# EAGLE board Circuit (EAGLE 6.5.0)
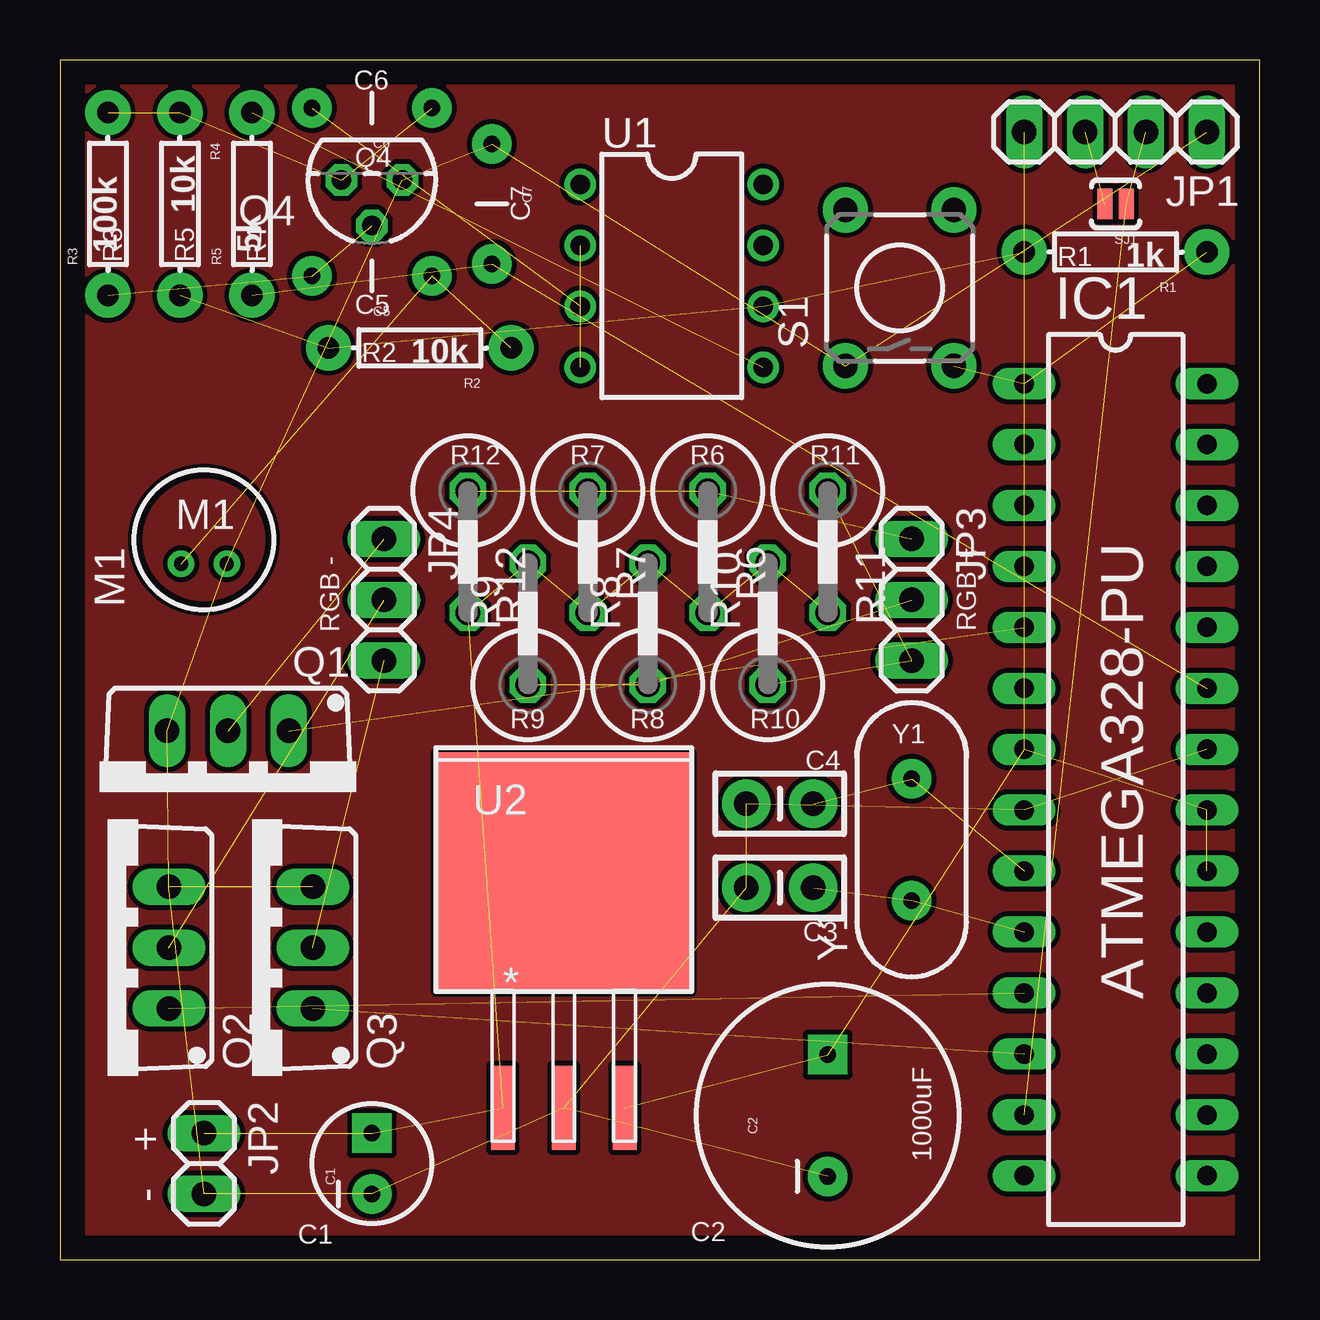
[diagram p0: board, top side]
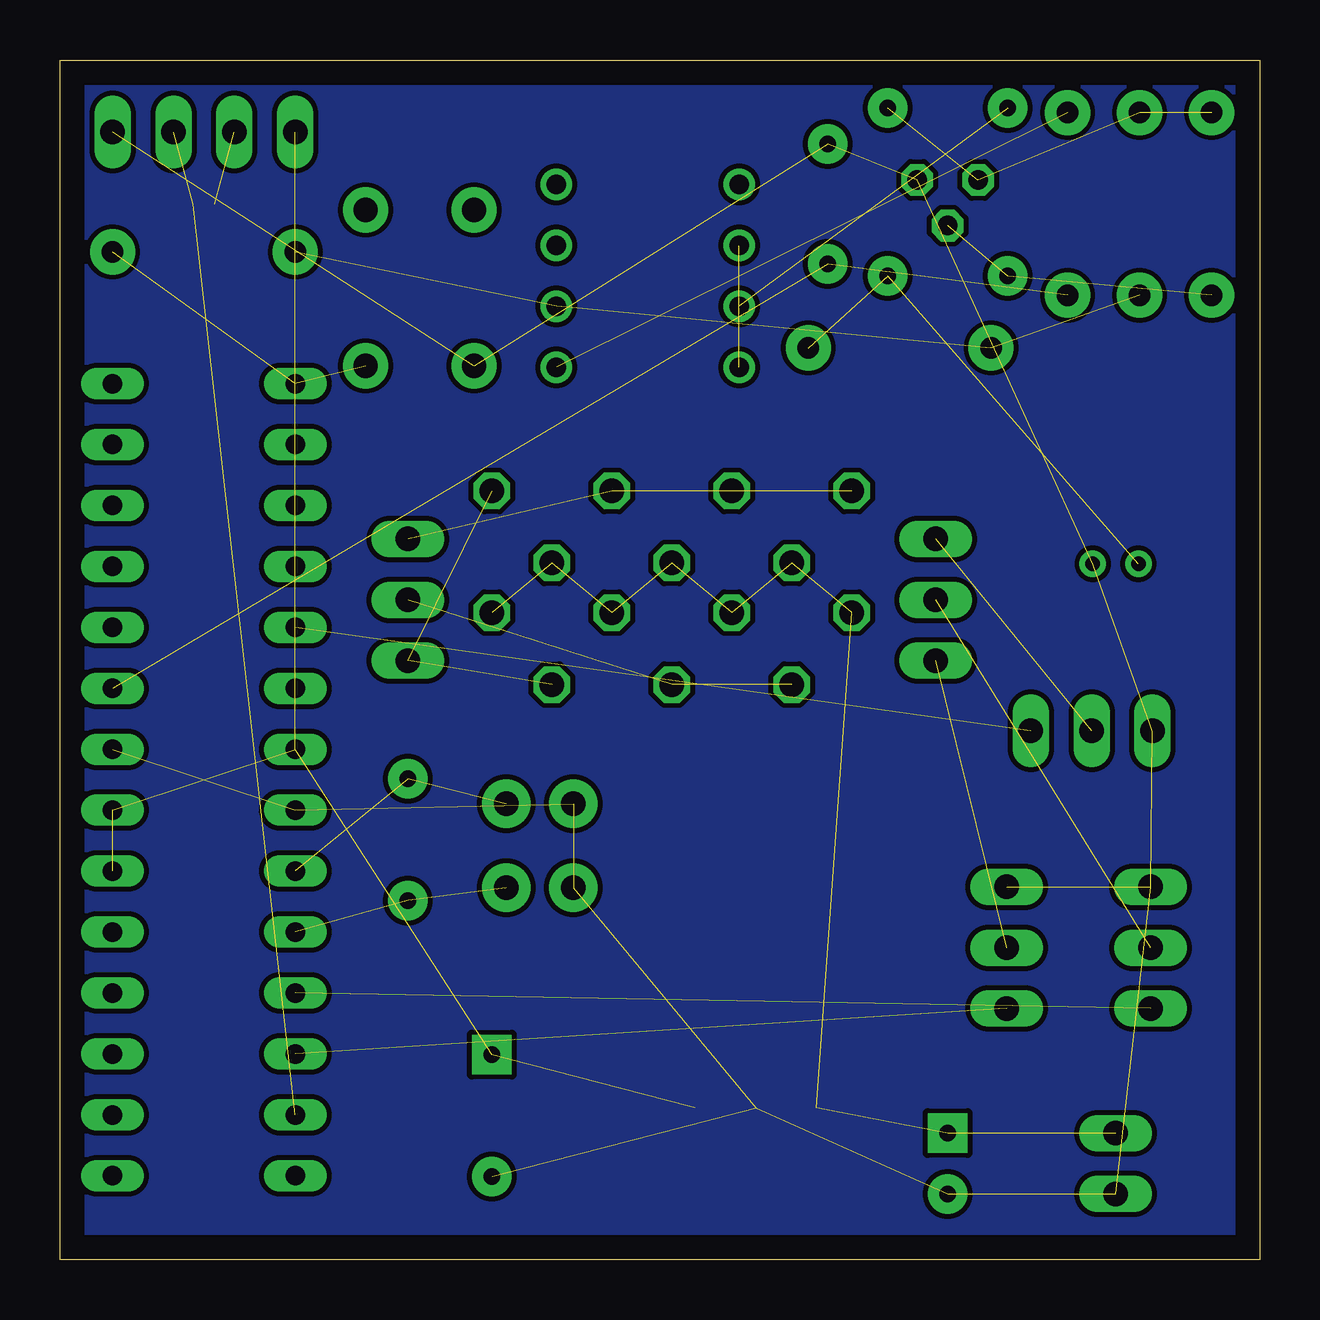
[diagram p1: board, bottom side, seen from below]

Size 50 x 50 mm. Coordinates in mm from the lower left corner, seen from the top.
Outline: 0,0 50,0 50,50 0,50 0,0
Copper layers (1*16): Top 0.035mm / dielectric 1.5mm / Bottom 0.035mm
Design rules "default": minimum track width 10mil, minimum drill 24mil, track to track 8mil, track to pad 8mil, pad to pad 8mil, via to via 8mil, smd to smd 8mil, copper to edge 40mil, drill to drill 8mil, minimum pad ring 10mil, minimum via ring 8mil, stop-mask expansion 4mil, vias tented up to drill 0mil, thermal gap 10mil

## Footprints (pad centres in the part's own frame; a part is rotated, then mirrored left to right if it is on the bottom)
CPOL-RADIAL-10UF-25V = drill 0.7 pad 1.651 square: 1 1.27,0 | drill 0.7 pad 1.651: 2 -1.27,0
CPOL-RADIAL-1000UF-25V = drill 0.7 pad 1.651 square: 1 2.54,0 | drill 0.7 pad 1.651: 2 -2.54,0
CAP-PTH-SMALL-KIT = drill 1.016 pad 2.032: 1 -1.397,0; 2 1.397,0
CAP-PTH-5MM = drill 0.7 pad 1.651: 1 -2.5,0; 2 2.5,0
DIL28-3 = drill 0.813 long: 1 -16.51,-3.81; 2 -13.97,-3.81; 3 -11.43,-3.81; 4 -8.89,-3.81; 5 -6.35,-3.81; 6 -3.81,-3.81; 7 -1.27,-3.81; 8 1.27,-3.81; 9 3.81,-3.81; 10 6.35,-3.81; 11 8.89,-3.81; 12 11.43,-3.81; 13 13.97,-3.81; 14 16.51,-3.81; 15 16.51,3.81; 16 13.97,3.81; 17 11.43,3.81; 18 8.89,3.81; 19 6.35,3.81; 20 3.81,3.81; 21 1.27,3.81; 22 -1.27,3.81; 23 -3.81,3.81; 24 -6.35,3.81; 25 -8.89,3.81; 26 -11.43,3.81; 27 -13.97,3.81; 28 -16.51,3.81
1X04 = drill 1.016 long: 1 -3.81,0; 2 -1.27,0; 3 1.27,0; 4 3.81,0
1X02 = drill 1.016 long: 1 -1.27,0; 2 1.27,0
1X03 = drill 1.016 long: 1 -2.54,0; 2 0,0; 3 2.54,0
WM-62PC/62PK = drill 0.6 pad 1: 1 -1,0.95; 2 -1,-0.95
TO220BV = drill 1.016 long: D 0,-2.54; G -2.54,-2.54; S 2.54,-2.54
TO92 = drill 0.813 octagon: 1 1.27,0; 2 0,1.905; 3 -1.27,0
AXIAL-0.3EZ = drill 0.9 pad 1.88: P$1 -3.81,0; P$2 3.81,0
P0613V = drill 1.016 octagon: 1 -2.54,0; 2 2.54,0
TACTILE-PTH = drill 1.016 pad 1.88: 1 -3.251,2.261; 2 3.251,2.261; 3 -3.251,-2.261; 4 3.251,-2.261
SJ_2S-NO = smd 0.635 x 1.27: 1 -0.45,0; 2 0.45,0
DIL08 = drill 0.813 pad 1.27: 1 -3.81,-3.81; 2 -1.27,-3.81; 3 1.27,-3.81; 4 3.81,-3.81; 5 3.81,3.81; 6 1.27,3.81; 7 -1.27,3.81; 8 -3.81,3.81
KTT3_6P22X6P6 = smd 10.668 x 9.957: 4 0,0.152 | smd 0.965 x 3.505: GND 0,-9.677; IN -2.54,-9.677; OUT 2.54,-9.677
HC49US = drill 0.7 pad 1.651: 1 -2.54,0; 2 2.54,0

## Placement (x,y rotation side)
C1  22uF  [CPOL-RADIAL-10UF-25V]  13,4 90 top
C2  1000uF  [CPOL-RADIAL-1000UF-25V]  32,6 90 top
C3  22pf  [CAP-PTH-SMALL-KIT]  30,19 0 top
C4  22pf  [CAP-PTH-SMALL-KIT]  30,15.5 0 top
C5  0.1u  [CAP-PTH-5MM]  13,41 180 top
C6  0.1u  [CAP-PTH-5MM]  13,48 180 top
C7  0.1u  [CAP-PTH-5MM]  18,44 270 top
IC1  ATMEGA328-PU  [DIL28-3]  44,20 270 top
JP1  FS1000A  [1X04]  44,47 180 top
JP2  SUPPLY  [1X02]  6,4 270 top
JP3  RGB +  [1X03]  35.5,27.5 270 top
JP4  RGB -  [1X03]  13.5,27.5 270 top
M1  MIC  [WM-62PC/62PK]  6,30 90 top
Q1  IRF520  [TO220BV]  7,19.5 180 top
Q2  IRF520  [TO220BV]  2,13 90 top
Q3  IRF520  [TO220BV]  8,13 90 top
Q4  2N3904  [TO92]  13,45 180 top
R1  1k  [AXIAL-0.3EZ]  44,42 180 top
R2  10k  [AXIAL-0.3EZ]  15,38 180 top
R3  100k  [AXIAL-0.3EZ]  2,44 90 top
R4  10k  [AXIAL-0.3EZ]  5,44 270 top
R5  5k  [AXIAL-0.3EZ]  8,44 90 top
R6  [P0613V]  27,29.5 270 top
R7  [P0613V]  22,29.5 270 top
R8  [P0613V]  24.5,26.5 90 top
R9  [P0613V]  19.5,26.5 90 top
R10  [P0613V]  29.5,26.5 90 top
R11  [P0613V]  32,29.5 270 top
R12  [P0613V]  17,29.5 270 top
S1  SWITCH-MOMENTARY-2PTH  [TACTILE-PTH]  35,40.5 90 top
SJ1  SOLDERJUMPERNO  [SJ_2S-NO]  44,44 180 top
U1  LM386N-4  [DIL08]  25.5,41 270 top
U2  UCC283-5_KTT_3  [KTT3_6P22X6P6]  21,16 0 top
Y1  16MHz  [HC49US]  35.5,17.5 90 top

## Library data of the parts
C1-C7 = SparkFun-Capacitors
IC1 = Arduino-AVR
JP1-JP4 = pinhead
M1 = microphon
Q1-Q3 = transistor-power
Q4 = transistor-npn
R1-R5 = SparkFun-Resistors
R6-R12 = resistor
S1 = SparkFun-Electromechanical
SJ1 = SparkFun-Passives
U1 = linear
U2 = UCC283-5; DATASHEETURL: http://www.ti.com/lit/gpn/UCC283-5; DESCRIPTION: Single Output LDO, 3.0A, Fixed(5.0V), Reverse Current Protection, Thermal Shutdown; FAMILY_NAME: SINGLE CHANNEL LDO; GENERIC_PART_NUMBER: UCC283-5; INDUSTRY_STD_PKG_TYPE: DDPAK/TO-263; MANUFACTURER: Texas Instruments; MANUFACTURER_PART_NUMBER: ucc283-5_ktt_3; PACKAGE_DESIGNATOR: KTT; PIN_COUNT: 3; VENDOR: Texas Instruments
Y1 = SparkFun-FreqCtrl

## Nets
+5V: C2.1 IC1.7 IC1.20 IC1.21 JP1.4 R1.P$2 R2.P$2 R4.P$2 U1.6 U2.OUT
+12V: C1.1 JP2.1 R6.2 R7.2 R8.2 R9.2 R10.2 R11.2 R12.2 U2.IN
BLUE: IC1.12 Q3.G
GND: C1.2 C2.2 C3.1 C4.1 C7.1 IC1.8 IC1.22 JP1.1 JP2.2 M1.2 Q1.S Q2.S Q3.S Q4.3 S1.1 U2.GND
GREEN: IC1.11 Q2.G
MIC: C7.2 IC1.23 R5.P$1
N$1: JP1.3 SJ1.2
N$2: C3.2 IC1.9 Y1.2
N$3: C4.2 IC1.10 Y1.1
N$4: IC1.1 R1.P$1 S1.3
N$5: JP4.1 Q1.D
N$6: JP4.2 Q2.D
N$7: JP4.3 Q3.D
N$8: C5.2 Q4.2 R3.P$1
N$9: C5.1 M1.1 R2.P$1
N$11: C6.1 Q4.1 R3.P$2 R4.P$1
N$12: R5.P$2 U1.5
N$15: U1.2 U1.4
N$16: JP3.1 R6.1 R7.1 R12.1
N$17: JP3.2 R8.1 R9.1
N$18: JP3.3 R10.1 R11.1
N$19: C6.2 U1.3
RED: IC1.5 Q1.G
RX: IC1.13 JP1.2 SJ1.1

## Tracks (layer width: path | path; a pad name or v marks a point on that pad's centre or on a via)
+5V  (9 unrouted)
+12V  (9 unrouted)
BLUE  (1 unrouted)
GND  (15 unrouted)
GREEN  (1 unrouted)
MIC  (2 unrouted)
N$1  (1 unrouted)
N$2  (2 unrouted)
N$3  (2 unrouted)
N$4  (2 unrouted)
N$5  (1 unrouted)
N$6  (1 unrouted)
N$7  (1 unrouted)
N$8  (2 unrouted)
N$9  (2 unrouted)
N$10
  pour Top: 0,50 50,50 50,0 0,0
N$11  (3 unrouted)
N$12  (1 unrouted)
N$14
  pour Bottom: 0,50 50,50 50,0 0,0
N$15  (1 unrouted)
N$16  (3 unrouted)
N$17  (2 unrouted)
N$18  (2 unrouted)
N$19  (1 unrouted)
RED  (1 unrouted)
RX  (2 unrouted)

## Text on the board
_tsilk: C6 | Q4 | U1 | C7 | R3 | R5 | R4 | R1 | C5 | R2 | R12 | R7 | R6 | R11 | M1 | ATMEGA328-PU | RGB - | RGB + | R9 | R8 | R10 | Y1 | C4 | C3 | - + | 1000uF | C2 | C1